# Altium PCB Transmisor.PCBDOC
Units mil, origin at the board's own origin, x right, y up, seen from the top; angles counter-clockwise.
Board outline 3550 x 3775 mil, 10 copper layers (TopLayer, MidLayer1, MidLayer2, MidLayer3, MidLayer4, MidLayer5, MidLayer6, MidLayer7, MidLayer8, BottomLayer); 35 components, 41 nets, 194 pads, 0 vias.
Unrouted connection lines stored in the file: 86.
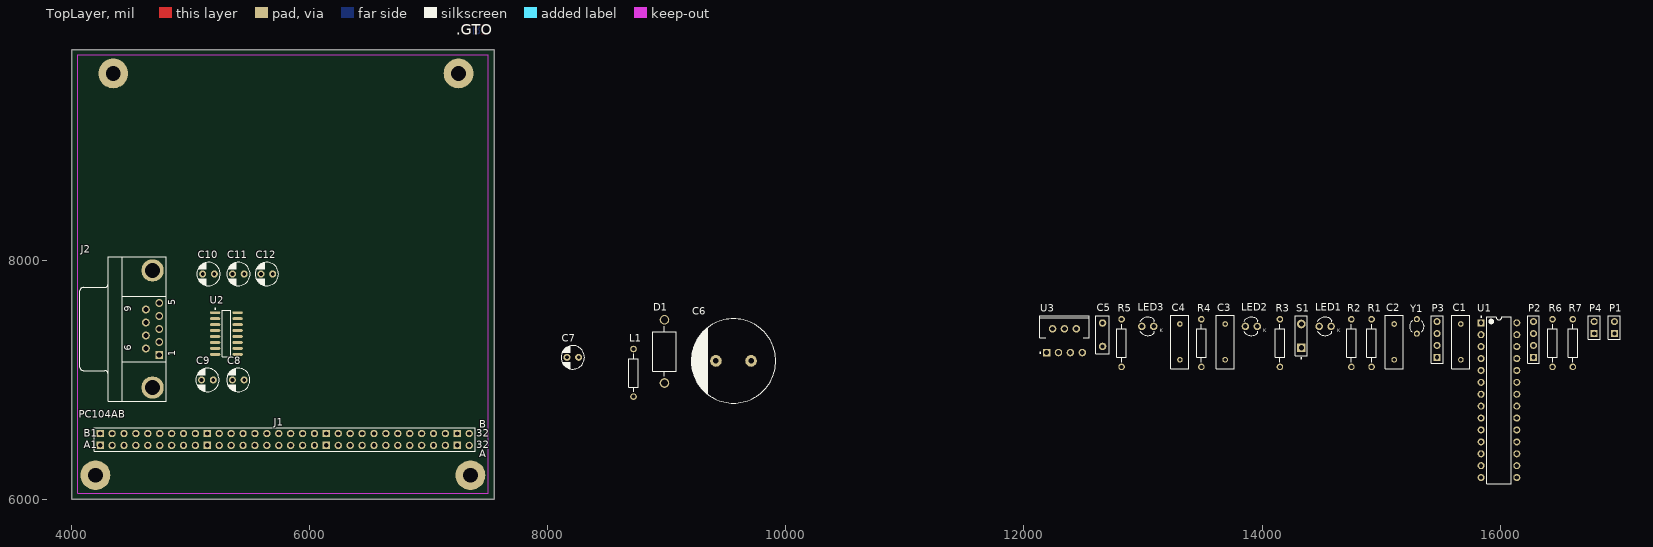
[diagram p0: TopLayer view]
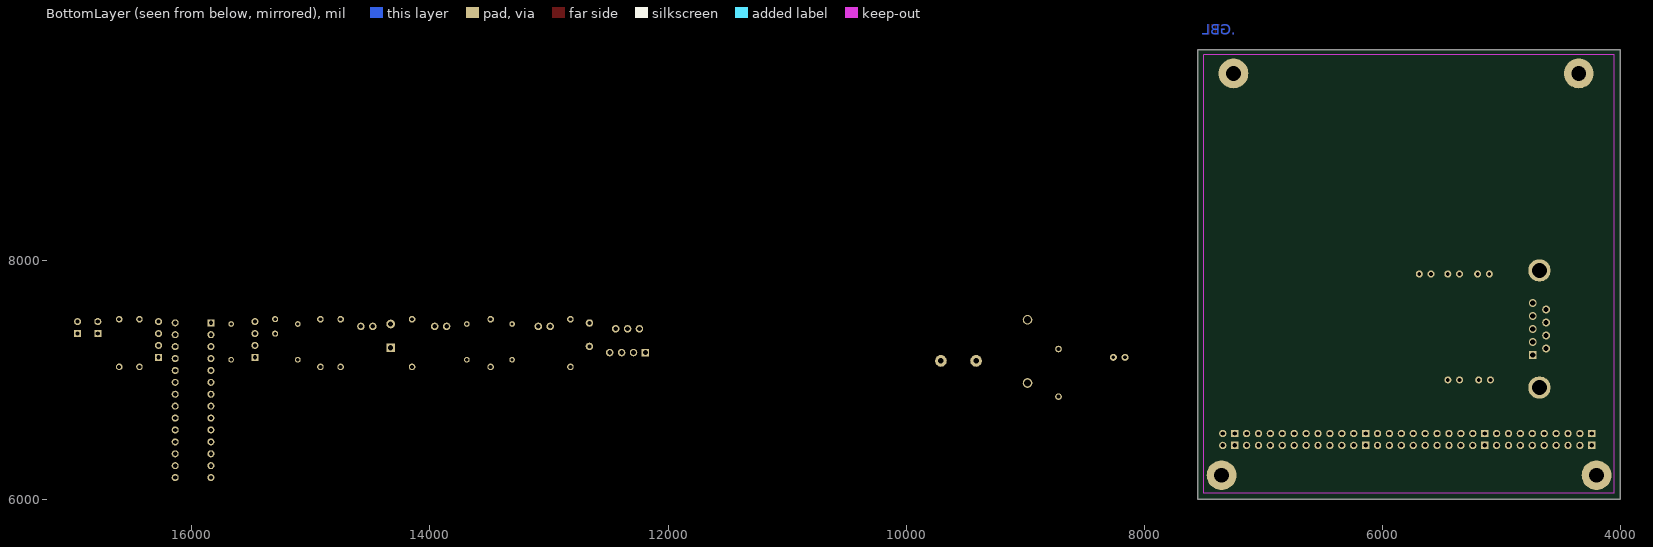
[diagram p1: BottomLayer view, seen from below]
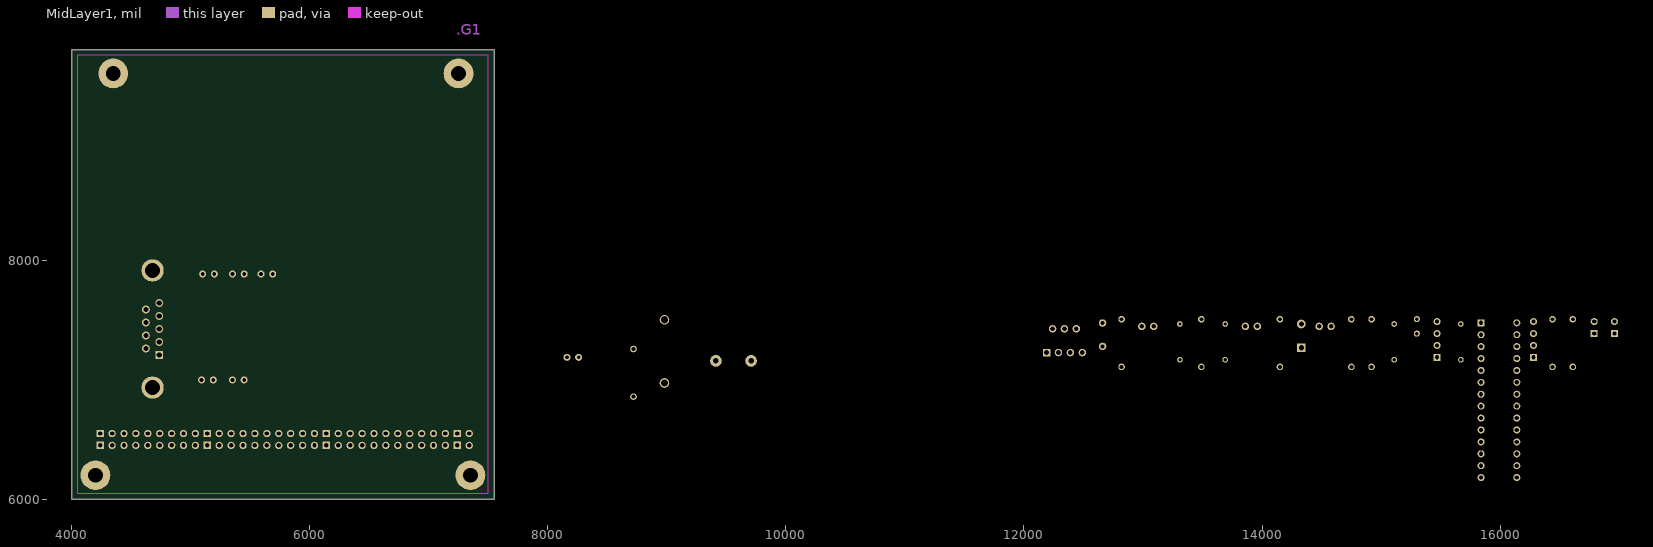
[diagram p2: MidLayer1]
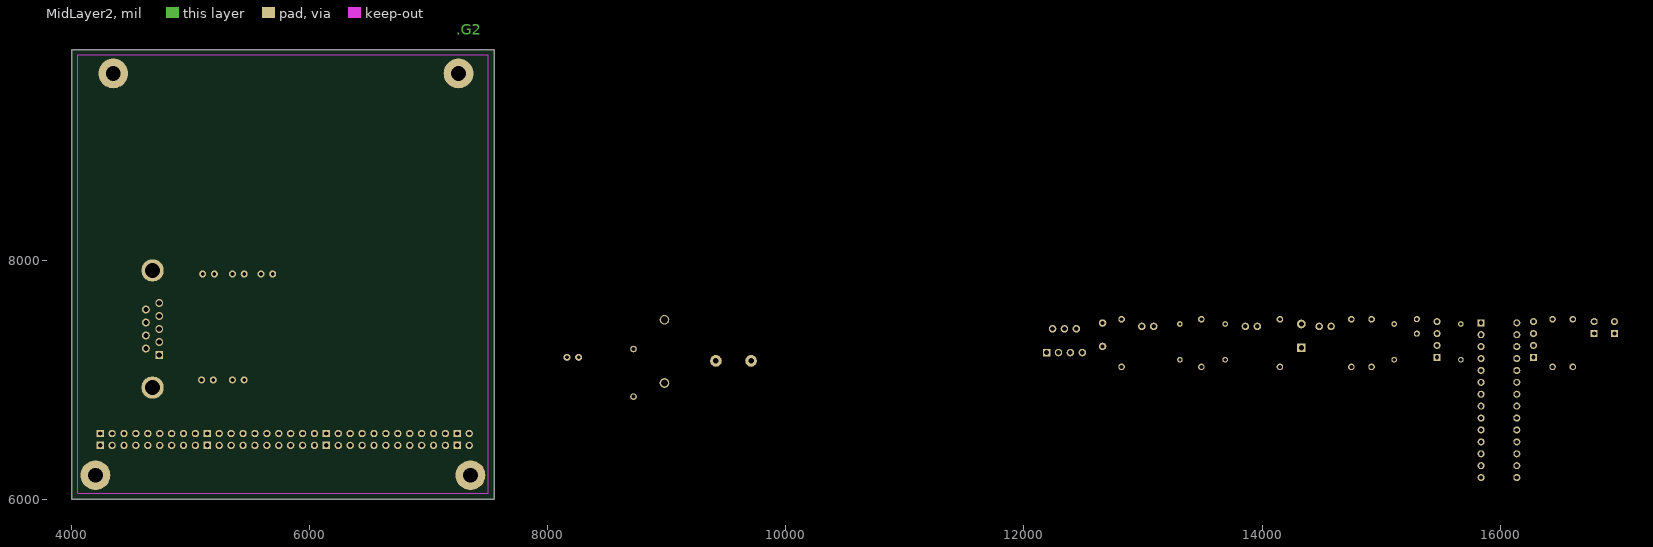
[diagram p3: MidLayer2]
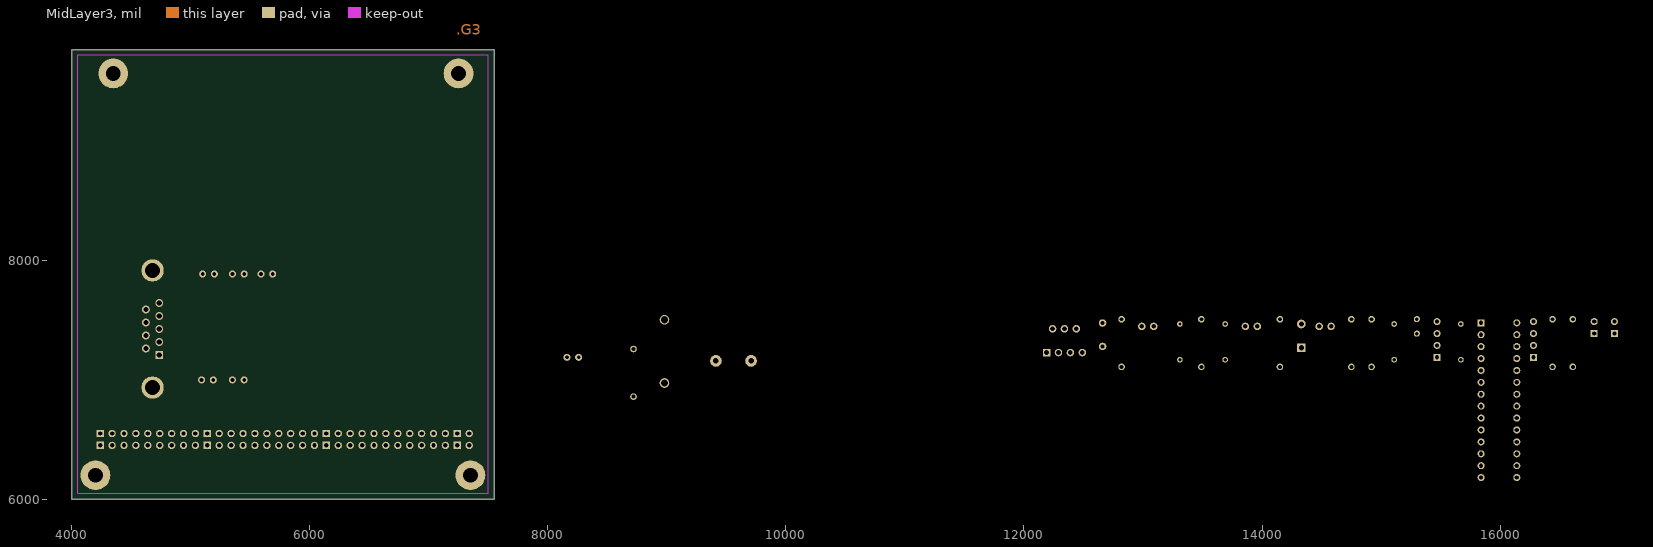
[diagram p4: MidLayer3]
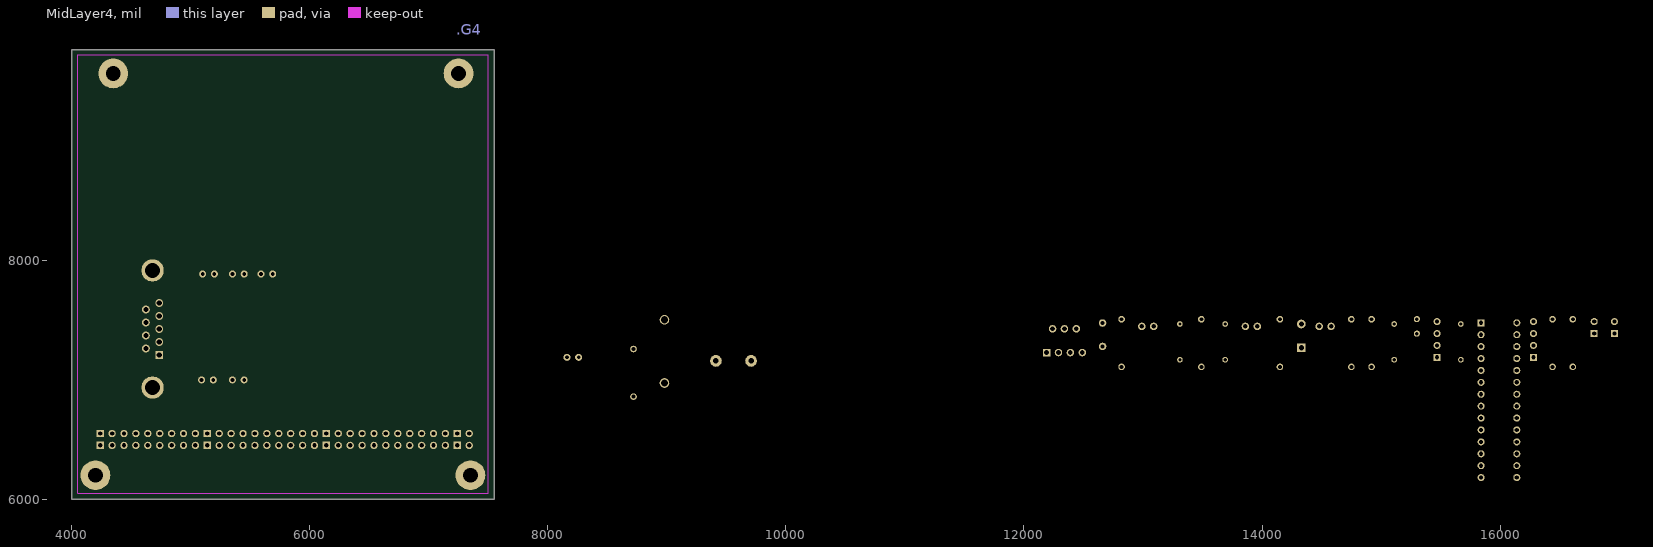
[diagram p5: MidLayer4]
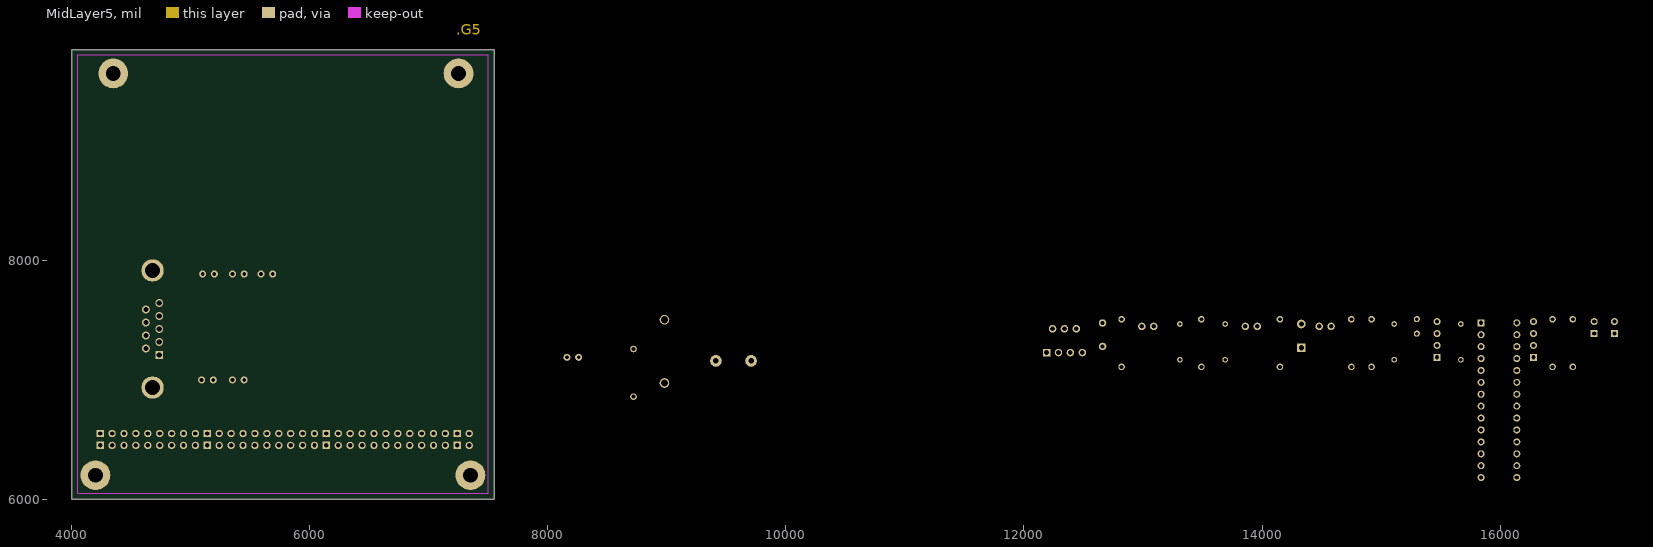
[diagram p6: MidLayer5]
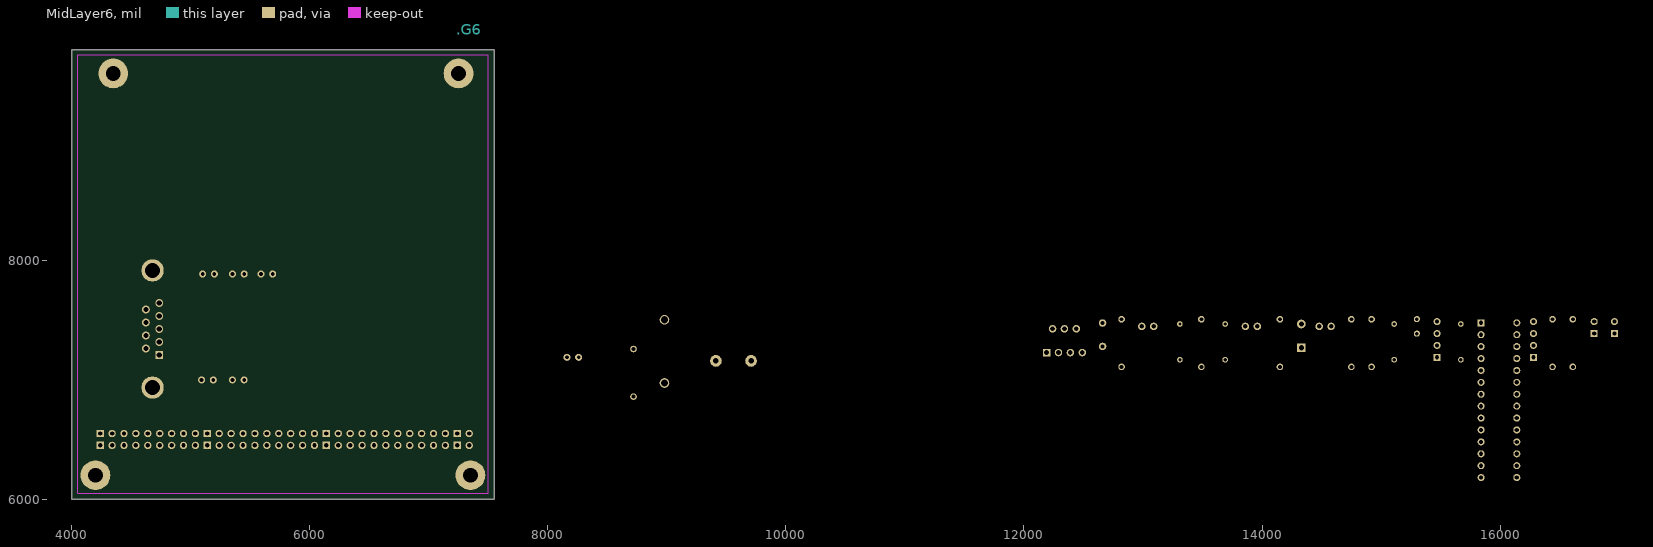
[diagram p7: MidLayer6]
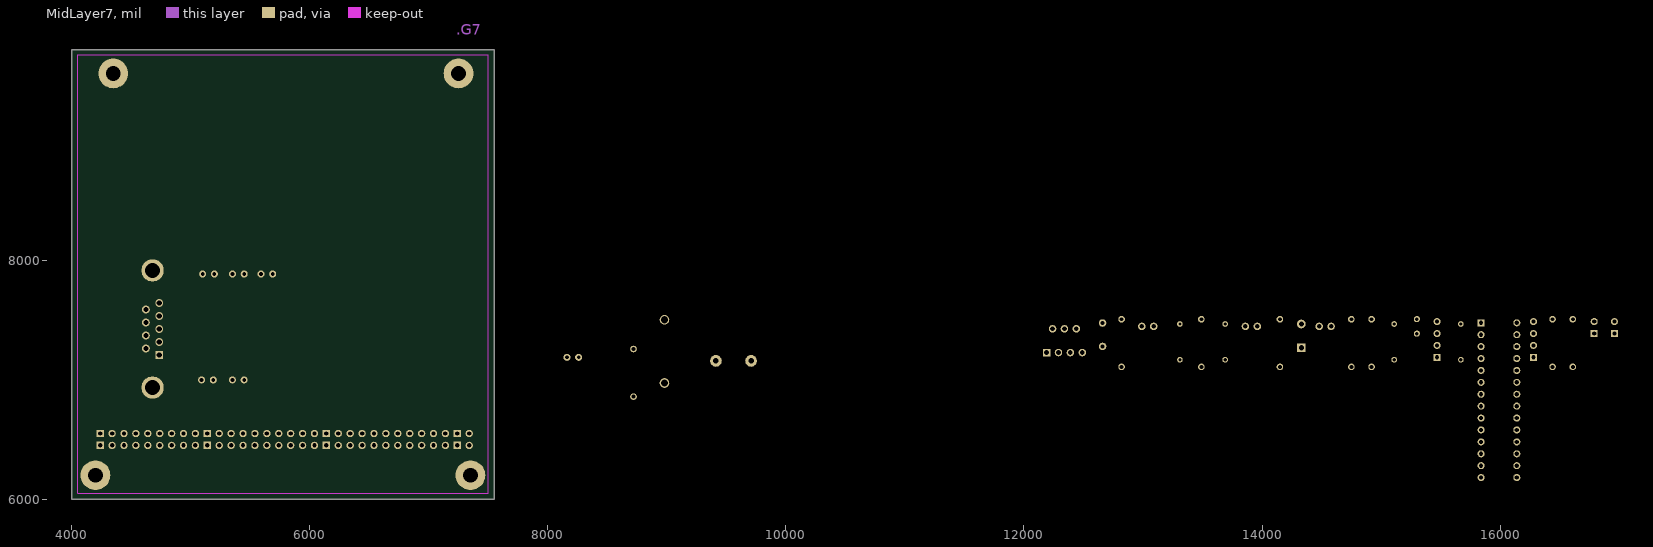
[diagram p8: MidLayer7]
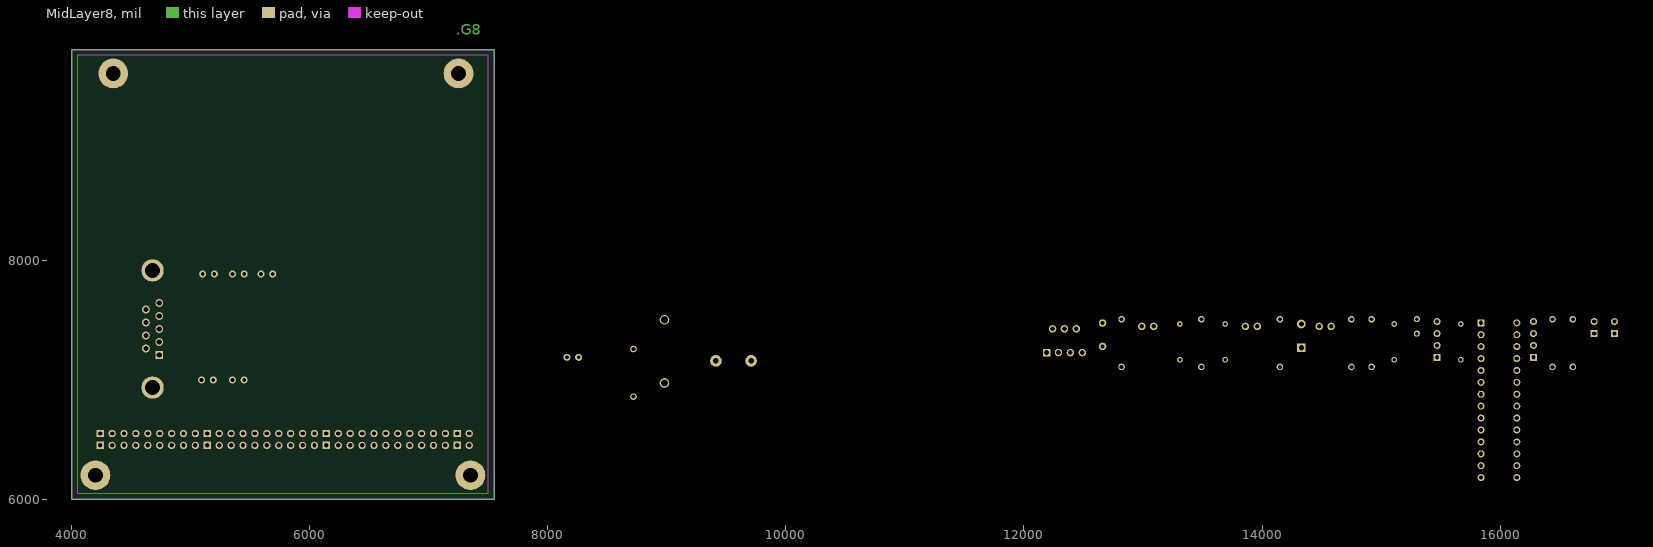
[diagram p9: MidLayer8]

## Layer stack, top to bottom
TopSolder: solder mask 0.4, Solder Resist, Dk 3.5
TopLayer: signal copper 1.4
Dielectric1: core 12.6, FR-4, Dk 4.8
MidLayer1: signal copper 1.4
Dielectric2: prepreg 12.6, FR-4, Dk 4.8
MidLayer2: signal copper 1.4
Dielectric3: core 12.6, FR-4, Dk 4.8
MidLayer3: signal copper 1.4
Dielectric4: prepreg 12.6, FR-4, Dk 4.8
MidLayer4: signal copper 1.4
Dielectric5: core 12.6, FR-4, Dk 4.8
MidLayer5: signal copper 1.4
Dielectric6: prepreg 12.6, FR-4, Dk 4.8
MidLayer6: signal copper 1.4
Dielectric7: core 12.6, FR-4, Dk 4.8
MidLayer7: signal copper 1.4
Dielectric8: prepreg 12.6, FR-4, Dk 4.8
MidLayer8: signal copper 1.4
Dielectric9: core 12.6, FR-4, Dk 4.8
BottomLayer: signal copper 1.4
BottomSolder: solder mask 0.4, Solder Resist, Dk 3.5

## Board outline
4000,6000 7550,6000 7550,9775 4000,9775

## Design rules (kind name [scope] priority, off if disabled: settings)
Clearance [All] p1: gap=10 ignorepadtopadclearanceinfootprint=FALSE except(0: Arc-Hole Track-Hole SMDPad-Hole THPad-Hole Via-Hole Fill-Hole Poly-Hole Region-Hole Text-Hole)
FabricationTestPointUsage TestPointUsage [All] p1: valid=0 allowmultiple=FALSE
FabricationTestpoint Testpoint [All] p1: side=3 testpointundercomponent=TRUE minsize=40 maxsize=100 preferedsize=60 minholesize=20 maxholesize=40 preferedholesize=32 testpointgrid=1 allowsidetop=TRUE allowsidebottom=TRUE usegrid=TRUE gridtolerance=0.01
PlaneClearance [All] p1: clearance=0
PolygonConnect [All] p1: connectstyle=Relief reliefconductorwidth=10 reliefentries=4 polygonreliefangle="90 Angle" airgapwidth=10
RoomDefinition Transmisor [InComponentClass('Transmisor')] p1: confinementstyle=ConfineIn formatcopy=TRUE lockcomponents=FALSE outline 7590,6110 17020,6110 17020,7660 7590,7660
RoutingVias [All] p1: holewidth=20 width=50 viastyle="Through Hole" minholewidth=28 minwidth=50 maxholewidth=28 maxwidth=50
SilkToSolderMaskClearance SilkscreenOverComponentPads [IsPad] p1: minsilkscreentomaskgap=10 clearancetoexposedcopper=TRUE
SolderMaskExpansion [All] p1: expansion=4
Width [All] p1: maxlimit=10 minlimit=10 preferedwidth=10
26 further rules are at their usual default settings.

## Components (designator, comment, footprint, x,y, rotation, side; value= is the part's Value field where it differs from the comment)
C1 "Cap" RAD-0.3 15670,7320 r90 top value=18pF
C2 "Cap" RAD-0.3 15110,7320 r90 top value=18pF
C3 "Cap" RAD-0.3 13690,7320 r90 top value=10uF
C4 "Cap" RAD-0.3 13310,7320 r90 top value=0.1uF
C5 "0.01uF" "C Disc 8x2.5-5.0" 12660,7380 r90 top
C6 "1000uF" "C Elec TH V 18x35-7.5" 9560,7160 r0 top
C7 "220uF" "C Elec TH V 4x7-2.5" 8210,7190 r0 top
C8 "0.1uF" "C Elec TH V 4x7-2.5" 5400,7000 r0 top
C9 "C Pol" "C Elec TH V 4x7-2.5" 5140.79,7000 r0 top
C10 "C Pol" "C Elec TH V 4x7-2.5" 5150,7890 r0 top
C11 "C Pol" "C Elec TH V 4x7-2.5" 5400.79,7890 r0 top
C12 "C Pol" "C Elec TH V 4x7-2.5" 5640,7890 r0 top
D1 "1N5820G" ONSC-AXIAL_LEAD-2-267-05_V 8980,7240 r90 top
J1 "PC104AB" PC104AB 4240,6450 r0 top locked
J2 "D Connector 9" DSUB1.385-2H9 4305.98,7428.07 r90 top
L1 "Inductor Iron" AXIAL-0.4 8720,7060 r90 top value=22uH
LED1 "151033BS03000" "Type 3mm" 14530,7450 r0 top
LED2 "151033BS03000" "Type 3mm" 13910,7450 r0 top
LED3 "151033BS03000" "Type 3mm" 13040,7450 r0 top
P1 "INPUT-SER-DATA" HDR1X2 16960,7390 r90 top
P2 "Sensor1" HDR1X4 16280,7190 r90 top
P3 "Sensor2" HDR1X4 15470,7190 r90 top
P4 "POWER-BATTERY" HDR1X2 16790,7390 r90 top
R1 "Res2" AXIAL-0.4 14920,7310 r90 top value=10k
R2 "Res2" AXIAL-0.4 14750,7310 r90 top value=470
R3 "Res2" AXIAL-0.4 14150,7310 r90 top value=220
R4 "Res2" AXIAL-0.4 13490,7310 r90 top value=220
R5 "Res2" AXIAL-0.4 12820,7310 r90 top value=220
R6 "Res2" AXIAL-0.4 16440,7310 r90 top value=3.7k
R7 "Res2" AXIAL-0.4 16610,7310 r90 top value=4.7k
S1 "SW-PB" SPST-2 14330,7370 r90 top
U1 "PIC18F26J13-I/SP" MCHP-SPDIP-SP28 15990,6830 r0 top
U2 "MAX3232ESE" NSO16_N 5300,7390 r0 top
U3 "LM2678T-ADJ/NOPB" TA07B 12340,7330 r0 top
Y1 "XTAL" R38 15300,7450 r0 top

## Footprints (in the part's own frame and the unit in brackets; to place one, negate y for a bottom-side part, rotate by r counter-clockwise, add the part's x,y. Pads: shape width x height; smd on the part's side, far side on the other; paste and mask are expansions set on the pad)
AXIAL-0.4 [mm] "Axial Device, Thru-Hole; 2 Leads; 0.4 in Pin Spacing"
  round 1.4 hole 0.85: 1(-5.08,0) 2(5.08,0)
  silkscreen extent -4.06,-1.02 4.06,1.02
"C Disc 8x2.5-5.0" [mm] "C Disc 5x2.5-5.0"
  round 1.6 hole 0.8: 1(-2.5,0) 2(2.5,0)
  silkscreen extent -4.1,-1.4 4.1,1.4, body extent -3.99,-1.29 3.99,1.29, height 8.05
"C Elec TH V 4x7-2.5" [mm] "C Elec TH 4x7 2.5mm pitch"
  round 1.5 hole 0.8: 1(-1.25,0) 2(1.25,0)
  silkscreen extent -2.5,-2.5 2.5,2.5, body extent -1.99,-1.98 2,1.98, height 7.05
"C Elec TH V 18x35-7.5" [mm] "C Elec TH 18x35 7.5mm pitch"
  round 2.5 hole 1.2: 1(-3.75,0) 2(3.75,0)
  silkscreen extent -9,-9 9,9, body extent -9,-9 9,9, height 35.05
DSUB1.385-2H9 [mm] "Connector; D Subminiature; 9 Position; Right Angle; Pitch 1.385 mm"
  rect 1.69x1.69 hole 1.09: 1(-5.54,-10.92)
  round 1.69 hole 1.09: 2(-2.77,-10.92) 3(0,-10.92) 4(2.77,-10.92) 5(5.54,-10.92) 6(-4.155,-8.08) 7(-1.385,-8.08) 8(1.385,-8.08) 9(4.155,-8.08)
  round 4.76 hole 3.26: 10(-12.495,-9.5) 11(12.495,-9.5)
  silkscreen extent -15.4,-12.4 15.4,6
HDR1X2 [mm] "Connector; Header; 2 Position"
  rect 1.5x1.5 hole 0.9: 1(0,0)
  round 1.5 hole 0.9: 2(2.54,0)
  silkscreen extent -1.27,-1.27 3.81,1.27
HDR1X4 [mm] "Connector; Header; 4 Position"
  rect 1.5x1.5 hole 0.9: 1(0,0)
  round 1.5 hole 0.9: 2(2.54,0) 3(5.08,0) 4(7.62,0)
  silkscreen extent -1.27,-1.27 8.89,1.27
MCHP-SPDIP-SP28 [mm] "DIP, 28-Leads, Body 34.86x6.79mm, Pitch 2.54mm"
  rect 1.5x1.5 hole 0.9: 1(-3.81,16.51)
  round 1.5 hole 0.9: 2(-3.81,13.97) 3(-3.81,11.43) 4(-3.81,8.89) 5(-3.81,6.35) 6(-3.81,3.81) 7(-3.81,1.27) 8(-3.81,-1.27) 9(-3.81,-3.81) 10(-3.81,-6.35) 11(-3.81,-8.89) 12(-3.81,-11.43) 13(-3.81,-13.97) 14(-3.81,-16.51) 15(3.81,-16.51) 16(3.81,-13.97) 17(3.81,-11.43) 18(3.81,-8.89) 19(3.81,-6.35) 20(3.81,-3.81) 21(3.81,-1.27) 22(3.81,1.27) 23(3.81,3.81) 24(3.81,6.35) 25(3.81,8.89) 26(3.81,11.43) 27(3.81,13.97) 28(3.81,16.51)
  silkscreen extent -3.93,-17.8 2.65,17.93, body extent -3.95,-17.77 3.95,17.77, height 5.08
NSO16_N [mm] "SOIC, 16-Leads, Body 9.9x3.9mm, Pitch 1.27mm, IPC Medium Density"
  oval 2.2x0.6 smd: 1(-2.4,4.445) 2(-2.4,3.175) 3(-2.4,1.905) 4(-2.4,0.635) 5(-2.4,-0.635) 6(-2.4,-1.905) 7(-2.4,-3.175) 8(-2.4,-4.445) 9(2.4,-4.445) 10(2.4,-3.175) 11(2.4,-1.905) 12(2.4,-0.635) 13(2.4,0.635) 14(2.4,1.905) 15(2.4,3.175) 16(2.4,4.445)
  silkscreen extent -2.52,-5 0.9,5.42, body extent -2,-5 2,5, height 1.75
ONSC-AXIAL_LEAD-2-267-05_V [mm] "AXIAL, 2-Leads, Diameter 5.05mm"
  round 2.05 hole 1.55: 1(-6.745,0) 2(6.745,0)
  silkscreen extent -5.32,-2.52 5.32,2.52
PC104AB [mil]
  rect 62x62 hole 37: A1(0,0) A10(900,0) A20(1900,0) A31(3000,0) B1(0,100) B10(900,100) B20(1900,100) B31(3000,100)
  round 62 hole 37: A2(100,0) A3(200,0) A4(300,0) A5(400,0) A6(500,0) A7(600,0) A8(700,0) A9(800,0) A11(1000,0) A12(1100,0) A13(1200,0) A14(1300,0) A15(1400,0) A16(1500,0) A17(1600,0) A18(1700,0) A19(1800,0) A21(2000,0) A22(2100,0) A23(2200,0) A24(2300,0) A25(2400,0) A26(2500,0) A27(2600,0) A28(2700,0) A29(2800,0) A30(2900,0) A32(3100,0) B2(100,100) B3(200,100) B4(300,100) B5(400,100) B6(500,100) B7(600,100) B8(700,100) B9(800,100) B11(1000,100) B12(1100,100) B13(1200,100) B14(1300,100) B15(1400,100) B16(1500,100) B17(1600,100) B18(1700,100) B19(1800,100) B21(2000,100) B22(2100,100) B23(2200,100) B24(2300,100) B25(2400,100) B26(2500,100) B27(2600,100) B28(2700,100) B29(2800,100) B30(2900,100) B32(3100,100)
  silkscreen extent -50,-50 3150,150
R38 [mm] "Crystal, Thru-Hole; 2 Leads; Body 3.1 x 8.2 mm (Dia.xH)"
  round 1.3 hole 0.7: 1(0,1.55) 2(0,-1.55)
  silkscreen extent -1.55,-1.19 1.55,1.17
RAD-0.3 [mm] "Radial Cap, Thru-Hole; 2 Leads; 0.3 in Pin Spacing"
  round 1.2 hole 0.7: 1(-3.81,0) 2(3.81,0)
  silkscreen extent -5.71,-1.91 5.71,1.91
SPST-2 [mm] "Switch; 2 Leads"
  rect 1.85x1.85 hole 1.1: 1(-2.54,0)
  round 1.85 hole 1.1: 2(2.54,0)
  silkscreen extent -4.89,-1.27 4.28,1.27
TA07B [mm] "TO, Thru-Hole, Vertical, Heatsink Mounted; 7 Bent Staggered Leads; Pitch 1.27 mm"
  rect 1.6x1.6 hole 1: 1(-3.81,-2.54)
  round 1.6 hole 1: 2(-2.54,2.54) 3(-1.27,-2.54) 4(0,2.54) 5(1.27,-2.54) 6(2.54,2.54) 7(3.81,-2.54)
  silkscreen extent -5.28,-2.66 5.25,5.35, body extent -5.3,-2.82 5.3,5.4, height 21.1
"Type 3mm" [mm] "THT, LED-3mm, 2pin- Body 4.15mm(max)"
  round 1.6 hole 1: 1(1.27,0) 2(-1.27,0)
  silkscreen extent -1.66,-1.95 1.4,1.95, body extent -1.93,-1.94 1.87,1.94, height 10.9

## Part data
C1 C2 C3 C4: "Capacitor", LatestRevisionDate=17-Jul-2002, LatestRevisionNote="Re-released for DXP Platform.", PackageDescription="Radial Cap, Thru-Hole; 2 Leads; 0.3 in Pin Spacing", PackageReference=RAD-0.3, Published=8-Jun-2000, Publisher="Altium Limited"
C5: library part C, "Capacitor, generic"
C6 C7 C8: library part "C Pol", "Capacitor, polarized, generic"
C9 C10 C11 C12: "Capacitor, polarized, generic"
D1: "Rectifier, 2-Pin Axial_Lead, Pb-Free, Bulk Bag", Manufacturer="On Semiconductor", ComponentLink1Description="Manufacturer URL", ComponentLink1URL=http://www.onsemi.com/, ComponentLink2Description=Datasheet, ComponentLink2URL=http://www.onsemi.cn/pub_link/Collateral/1N5820-D.PDF, ComponentLink3Description="Package Specification", ComponentLink3URL=http://www.onsemi.com/pub_link/Collateral/267-05.PDF, Configuration=Single, DatasheetVersion="Rev. 10", IFSM Max (A)=80, Mounting Technology="Through Hole", PackageDescription="2-Pin, Axial Lead, Diameter 5.05 mm", PackageReference=AXIAL_LEAD-2-267-05, PackageVersion="Rev. G, 06/2000", Packing="Bulk Bag", PartNumber=1N5820G, RoHS=TRUE
J1: "64-Pin Connector", Text Field6="Alternate Layout Available", Text Field7="Published 14-Feb-2002"
J2: "Receptacle Assembly, 9 Position, Right Angle", PackageDocument=O, DatasheetDocument=1-Sep-1999, Gender=Receptacle, LatestRevisionDate=17-Jul-2002, LatestRevisionNote="Re-released for DXP Platform.", Orientation="Right Angle", PackageReference=788750, Positions=9, Published=15-Jun-2001, Publisher="Altium Limited"
L1: "Magnetic-Core Inductor", LatestRevisionDate=17-Jul-2002, LatestRevisionNote="Re-released for DXP Platform.", PackageDescription="Axial Device, Thru-Hole; 2 Leads; 0.9 in Pin Spacing", PackageReference=AXIAL-0.9, Published=24-Mar-1999, Publisher="Altium Limited"
LED1 LED2 LED3: "THT LED round mono-color waterclear, WL-TMRW , Blue", Emitting color=Blue, ComponentLink1Description="Manufacturer URL", ComponentLink1URL=http://www.we-online.com, ComponentLink2Description=Datasheet, ComponentLink2URL=http://katalog.we-online.de/pbs/datasheet/7448042001.pdfhttp://katalog.we-online.de/pbs/datasheet/7448042001.pdfhttp://katalog.we-online.de/pbs/datasheet/7448042001.pdfhttp://katalog.we-online.de/pbs/datasheet/151033BS03000.pdf, PackageReference="Type 3mm", PartNumber=151033BS03000
P1 P4: library part "Header 2", "Header, 2-Pin", LatestRevisionDate=17-Jul-2002, LatestRevisionNote="Re-released for DXP Platform.", Publisher="Altium Limited"
P2 P3: library part "Header 4", "Header, 4-Pin", LatestRevisionDate=17-Jul-2002, LatestRevisionNote="Re-released for DXP Platform.", Publisher="Altium Limited"
R1 R2 R3 R4 R5 R6 R7: "Resistor", LatestRevisionDate=17-Jul-2002, LatestRevisionNote="Re-released for DXP Platform.", PackageDescription="Axial Device, Thru-Hole; 2 Leads; 0.4 in Pin Spacing", PackageReference=AXIAL-0.4, Published=8-Jun-2000, Publisher="Altium Limited"
S1: "Switch", LatestRevisionDate=17-Jul-2002, LatestRevisionNote="Re-released for DXP Platform.", PackageDescription="Switch; 2 Leads", PackageReference=SPST-2, Published=24-Mar-1999, Publisher="Altium Limited"
U1: "High-Performance Microcontroller with nanoWatt XLP Technology, 48 MHz, 23 I/O, -40 to 85 degC, 28-pin SPDIP (SP28), Tube", Manufacturer=Microchip, Operation Voltage Range="2.15 V - 3.6V", Supplier Part Number 1=PIC18F26J13-I/SP-ND, # of A/D Channels=10, ComponentLink1Description=Datasheet, ComponentLink1URL=http://ww1.microchip.com/downloads/en/DeviceDoc/39974A.pdf, ComponentLink2Description="Package Specification", ComponentLink2URL=http://www.microchip.com/stellent/groups/techpub_sg/documents/packagingspec/en012702.pdf, ComponentLink3Description="URL Link1", ComponentLink3URL="Product URL:http://www.microchip.com/datasheet/PIC18F26J13", DatasheetVersion="Rev. A", Digital Communication="2 -A/E/USART, 2 -MSSP(SPI/I2C)", I/O Pins=23, Internal Oscillator="8 MHz, 31 kHz", Max. CPU Speed MHz=48, Memory Type=Flash, Mounting Technology="Through Hole", PackageDescription="28-Lead Plastic Dual In-Line, 34.86 x 6.79 mm Body, 2.54 mm Pitch", PackageReference=SPDIP-SP28, PackageVersion="C04-070B, 12/2012", Packing=TUBE, PartNumber=PIC18F26J13-I/SP, Program Memory KBytes=64, Program Memory KWords=32, RAM=3800, RoHS=TRUE, Supplier 1=Digi-Key, Supplier 2=Farnell, Supplier 3=Newark, Supplier 4=Mouser, Supplier Part Number 2=2318328, Supplier Part Number 3=63R7827, Supplier Part Number 4=579-PIC18F26J13-I/SP, Timers="4 - 8-bit, 4 - 16-bit"
U2: "3.0V TO 5.5V, Low-Power, up to 1Mbps, True RS-232 Transceiver Using Four 0.1µF External Capacitor", Code_IPC=SOIC127P600-16, Code_JEDEC=MS-012-AC, ComponentLink1Description="Manufacturer Link", ComponentLink1URL=http://www.maxim-ic.com/, ComponentLink2Description=Datasheet, ComponentLink2URL=http://pdfserv.maxim-ic.com/en/ds/MAX3222-MAX3241.pdf, DatasheetVersion=Mar-1999, LatestRevisionDate=13-Apr-2006, LatestRevisionNote="IPC-7351 Footprint Added.", PackageDescription="16-Pin Small Outline Integrated Circuit 1.27 mm Pitch", PackageReference=NSO16, Published=16-Jan-2001, Publisher="Altium Limited"
U3: "SIMPLE SWITCHER® High Efficiency 5A Step-Down Voltage Regulator, 7-pin TO-220, Pb-Free", Manufacturer="National Semiconductor", PackageTopMarking=NSUZXYTTE#*LM2678*T-ADJ, PowerWise=N, Code_JEDEC=TO-220-AB, CompType=Switcher, DatasheetVersion=May-2008, PackageDescription="TO-220, Molded, .400 x .590 x .180in Body, 7 Lead, .050in Pitch, Staggered", PackageReference=TA07B, PackageVersion="revC, Apr-1999", PartNumber=LM2678T-ADJ/NOPB, PinCount=7, RoHS=Y
Y1: "Crystal Oscillator", LatestRevisionDate=17-Jul-2002, LatestRevisionNote="Re-released for DXP Platform.", PackageDescription="Crystal, Thru-Hole; 2 Leads; Body 3.1 x 8.2 mm (Dia.xH)", PackageReference=R38, Published=8-Jun-2000, Publisher="Altium Limited"

## Free pads (board coordinates)
  round 250 hole 125: 1(4200,6200) 2(7250,9575) 3(7350,6200) 4(4350,9575)

## Nets (pads, with @x,y where several pads share a name; then routed paths per layer and width w, separated by ;. In a path a pad name is that pad's centre, name@x,y a point inside that pad or via, vN(x,y) a via of type N, cw(c..) or ccw(c..) an arc to the next point about the centre after c; other vN are vias at no path point)
3v3: C7.2 C8.2 J1.A1 L1.2 P2.1 P3.1 R1.2 R6.1 U1.20 U2.16 U3.6
+9: C6.2 J1.B2 P4.1 U3.2 U3.7
GND: C1.1 C2.1 C3.1 C4.1 C6.1 C7.1 C8.1 C11.1 C12.2 D1.2 J1.B1 J2.5 P2.2 P3.2 P4.2 R3.2 R4.2 R5.2 R7.2 U1.4 U1.8 U2.15 U3.4
NetC1_2: C1.2 U1.10 Y1.1
NetC2_2: C2.2 U1.9 Y1.2
NetC3_2: C3.2 U1.6
NetC4_2: C4.2 S1.2
NetC5_1: C5.1 D1.1 L1.1 U3.1
NetC5_2: C5.2 U3.3
NetC9_1: C9.1 U2.5
NetC9_2: C9.2 U2.4
NetC10_1: C10.1 U2.3
NetC10_2: C10.2 U2.1
NetC11_2: C11.2 U2.2
NetJ1_A14: J1.A14 J1.B14 U1.25
NetJ1_A31: J1.A31 U2.10
NetJ1_A32: J1.A32 U2.9
NetJ1_B3: J1.B3 U1.5
NetJ1_B10: J1.B10 LED1.2 U1.21
NetJ1_B11: J1.B11 LED2.2 U1.22
NetJ1_B12: J1.B12 LED3.2 U1.23
NetJ1_B13: J1.B13 U1.24
NetJ1_B15: J1.B15 U1.26
NetJ1_B16: J1.B16 U1.27
NetJ1_B17: J1.B17 U1.28
NetJ1_B31: J1.B31 U2.7
NetJ1_B32: J1.B32 U2.8
NetJ2_2: J2.2 U2.14
NetJ2_3: J2.3 U2.13
NetLED1_1: LED1.1 R3.1
NetLED2_1: LED2.1 R4.1
NetLED3_1: LED3.1 R5.1
NetP1_1: P1.1 U1.3
NetP1_2: P1.2 U1.7
NetP2_3: P2.3 P3.3 U1.15
NetP2_4: P2.4 P3.4 U1.14
NetR1_1: R1.1 R2.2 S1.1
NetR2_1: R2.1 U1.1
NetR6_2: R6.2 R7.1 U1.2
NetU1_17: U1.17 U2.11
NetU1_18: U1.18 U2.12
pads on no net: C12.1 J1.A2 J1.A3 J1.A4 J1.A5 J1.A6 J1.A7 J1.A8 J1.A9 J1.A10 J1.A11 J1.A12 J1.A13 J1.A15 J1.A16 J1.A17 J1.A18 J1.A19 J1.A20 J1.A21 J1.A22 J1.A23 J1.A24 J1.A25 J1.A26 J1.A27 J1.A28 J1.A29 J1.A30 J1.B4 J1.B5 J1.B6 J1.B7 J1.B8 J1.B9 J1.B18 J1.B19 J1.B20 J1.B21 J1.B22 J1.B23 J1.B24 J1.B25 J1.B26 J1.B27 J1.B28 J1.B29 J1.B30 J2.1 J2.4 J2.6 J2.7 J2.8 J2.9 J2.10 J2.11 U1.11 U1.12 U1.13 U1.16 U1.19 U2.6 U3.5

## Keep-outs
KeepOutLayer:
  lines w8: 4050,6050 7500,6050 7500,9730 4050,9730 4050,6050

## Other copper
TopLayer:
  text ".GTL" at 7230,9898 h90
MidLayer1:
  text ".G1" at 7230,9898 h90
MidLayer2:
  text ".G2" at 7230,9898 h90
MidLayer3:
  text ".G3" at 7230,9898 h90
MidLayer4:
  text ".G4" at 7230,9898 h90
MidLayer5:
  text ".G5" at 7230,9898 h90
MidLayer6:
  text ".G6" at 7230,9898 h90
MidLayer7:
  text ".G7" at 7230,9898 h90
MidLayer8:
  text ".G8" at 7230,9898 h90
BottomLayer:
  text "P/N XXXXXX-XXX REV A" at 5320,10238 h75
  text ".GBL" at 7230,9898 h90

## Silkscreen, mask and mechanical layers (free items; w line width, h text height)
TopOverlay:
  rectangle: 4281,10731 5031,10931
  rectangle: 4281,10441 5031,10641
  lines w10: 5392.59,10833.97 ccw(c5441,10873.5) 5392.71,10833.83
  text "C" at 5496,10836 h60
  text "2002 COMPANY NAME" at 5646,10836 h75
  text "S/N" at 4031,10788.5 h75
  text "BOARD NAME" at 5496,10661 h75
  text "ASSY NO.: XXXXXX" at 5496,10511 h75
  text "REV" at 4031,10491 h75
  text ".GTO" at 7230,9898 h90
TopPaste:
  text ".GTP" at 7230,9898 h90
BottomPaste:
  text ".GBP" at 7230,9898 h90
TopSolder:
  text ".GTS" at 7230,9898 h90
BottomSolder:
  text ".GBS" at 7230,9898 h90
Mechanical1:
  the board outline again, w8
Mechanical4:
  text ".Pcb_File_Name_No_Path" at 5330,10088 h90
  text ".Printout_Name" at 5330,9898 h90
DrillDrawing:
  text ".LEGEND" at 7885,6270 h90
  text "Drilling Details." at 7895,6070 h90

## Dimensions
4200,5980 to 4000,6000 on Mechanical4
3980,6200 to 4000,6000 on Mechanical4

## Text inside footprints (layer, text, board x,y; h text height)
J1: TopOverlay "B" at 7422.5,6600 h60; TopOverlay "A" at 7422.5,6350 h60; TopOverlay "32" at 7400,6525 h60; TopOverlay "32" at 7400,6425 h60; TopOverlay "A1" at 4102.5,6425 h60; TopOverlay "B1" at 4102.5,6525 h60
J2: TopOverlay "6" at 4501.85,7244.8 h59.06 r90; TopOverlay "9" at 4501.85,7571.97 h59.06 r90; TopOverlay "5" at 4871.93,7626.5 h59.06 r90; TopOverlay "1" at 4871.93,7200.12 h59.06 r90
LED1: TopOverlay "K" at 14630,7400 h30; Mechanical15 "K" at 14630,7400 h30
LED2: TopOverlay "K" at 14010,7400 h30; Mechanical15 "K" at 14010,7400 h30
LED3: TopOverlay "K" at 13140,7400 h30; Mechanical15 "K" at 13140,7400 h30